# Altium PCB PCB2.PcbDoc
Units mil, origin at the board's own origin, x right, y up, seen from the top; angles counter-clockwise.
Board outline 6000 x 4000 mil, 2 copper layers (Top Layer, Bottom Layer); 19 components, 9 nets, 41 pads, 0 vias.
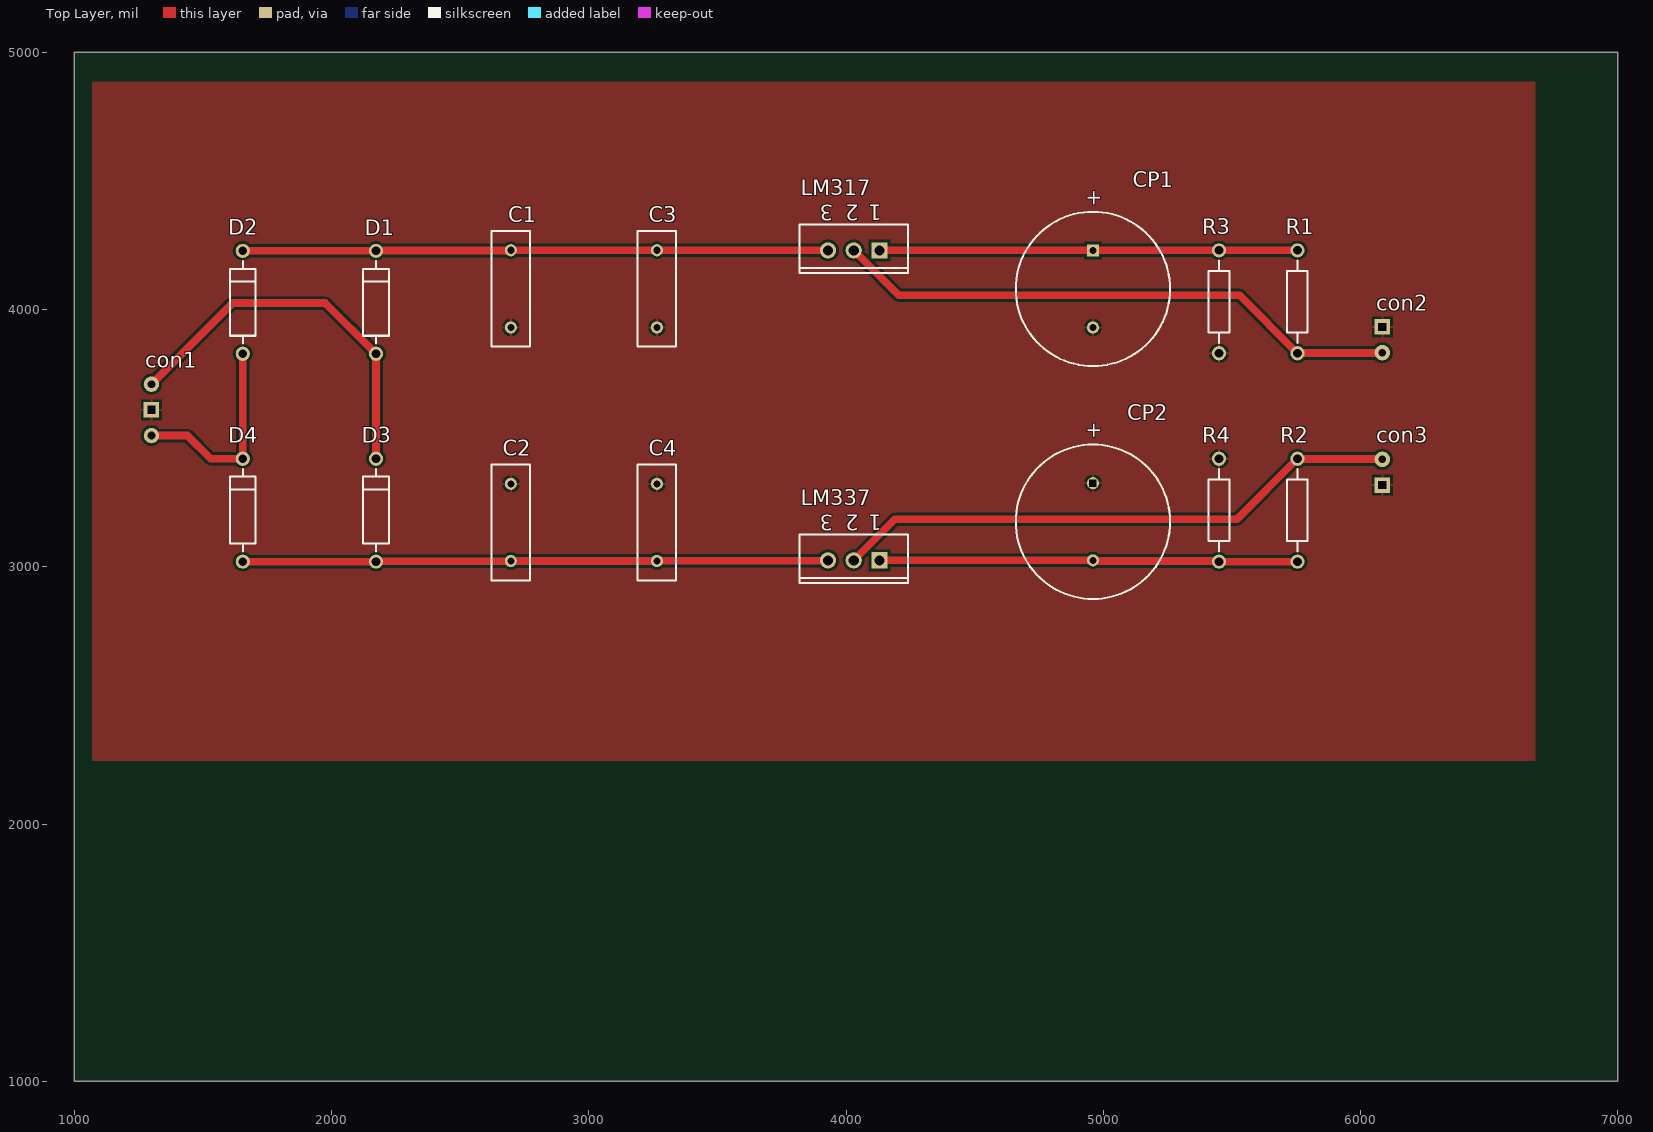
[diagram p0: Top Layer view]
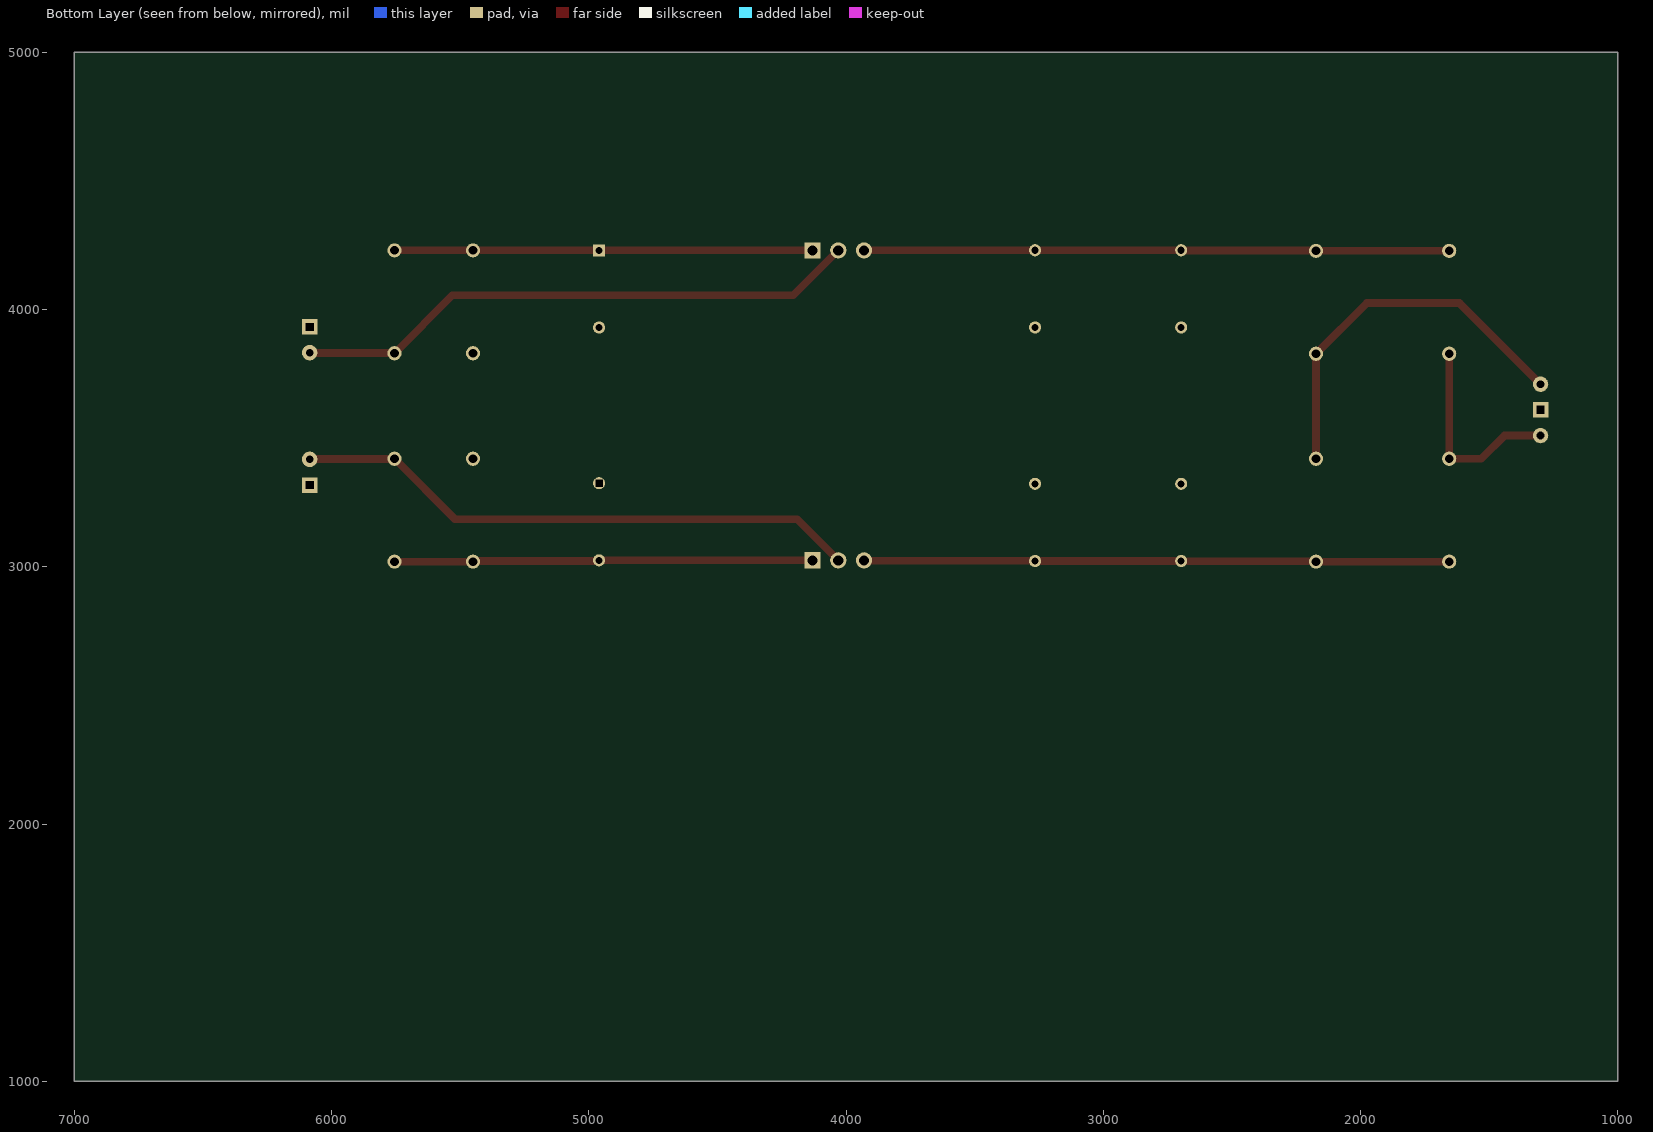
[diagram p1: Bottom Layer view, seen from below]

## Layer stack, top to bottom
Top Solder: solder mask 0.4, Solder Resist, Dk 3.5
Top Layer: signal copper 1.4
Dielectric 1: dielectric 12.6, FR-4, Dk 4.8
Bottom Layer: signal copper 1.4
Bottom Solder: solder mask 0.4, Solder Resist, Dk 3.5

## Board outline
1000,1000 7000,1000 7000,5000 1000,5000

## Design rules (kind name [scope] priority, off if disabled: settings)
Clearance [All] p1: gap=10 ignorepadtopadclearanceinfootprint=FALSE except(0: Arc-Hole Track-Hole SMDPad-Hole THPad-Hole Via-Hole Fill-Hole Poly-Hole Region-Hole Text-Hole)
PolygonConnect [All] p1: connectstyle=Relief reliefconductorwidth=10 reliefentries=4 polygonreliefangle="90 Angle" airgapwidth=10
RoomDefinition Sheet1 [InComponentClass('Sheet1')] p1: confinementstyle=ConfineIn formatcopy=TRUE lockcomponents=FALSE outline 1135,5320 6240,5320 6240,6040 1135,6040
RoutingVias [All] p1: holewidth=28 width=50 viastyle="Through Hole" minholewidth=28 minwidth=50 maxholewidth=28 maxwidth=50
SolderMaskExpansion [All] p1: expansion=4
Width [All] p1: maxlimit=30 minlimit=30 preferedwidth=30 minimp=50.000000 maximp=50.000000 favimp=50.000000
30 further rules are at their usual default settings.

## Components (designator, comment, footprint, x,y, rotation, side; value= is the part's Value field where it differs from the comment)
C1 "Cap" RAD-0.3 2697.13,4080.5 r90 top value=1000uF
C2 "Cap" RAD-0.3 2697.13,3172.38 r90 top value=1000uF
C3 "Cap" RAD-0.3 3265,4080.5 r90 top value=0.1uF
C4 "Cap" RAD-0.3 3265,3172.38 r90 top value=0.1uF
con1 "con3" con3 1300,3610 r90 top
con2 "con2" con2 6085,3832.44 r90 top
con3 "con2" con2 6085,3417.56 r270 top
CP1 "Cap Pol1" RB7.6-15#1 4960,4080 r90 top value=10uF
CP2 "Cap Pol1" RB7.6-15#2 4960,3175 r90 top locked value=10uF
D1 "Diode" DIODE-0.4 2172.87,4028.12 r90 top
D2 "Diode" DIODE-0.4 1655,4028.12 r90 top
D3 "Diode" DIODE-0.4 2172.87,3220 r90 top
D4 "Diode" DIODE-0.4 1655,3220 r90 top
LM317 "LM317" TO-220-AB 4030,4230 r180 top
LM337 "LM337" TO-220-AB 4030,3025 r180 top
R1 "Res2" AXIAL-0.4 5755,4030 r270 top value=200
R2 "Res2" AXIAL-0.4 5755,3220 r270 top value=200
R3 "Res2" AXIAL-0.4 5450,4030 r90 top value=600
R4 "Res2" AXIAL-0.4 5450,3220 r90 top value=600

## Footprints (in the part's own frame and the unit in brackets; to place one, negate y for a bottom-side part, rotate by r counter-clockwise, add the part's x,y. Pads: shape width x height; smd on the part's side, far side on the other; paste and mask are expansions set on the pad)
AXIAL-0.4 [mm] "Axial Device, Thru-Hole; 2 Leads; 0.4 in Pin Spacing"
  round 1.4 hole 0.85: 1(-5.08,0) 2(5.08,0)
  silkscreen extent -4.06,-1.02 4.06,1.02
con2 [mil]
  round 60 hole 30: 1(0,0)
  rect 60x60 hole 30 square: 2(100,0)
con3 [mil]
  round 60 hole 30: 1(-100,0) 3(100,0)
  rect 60x60 hole 30 square: 2(0,0)
DIODE-0.4 [mm] "Diode, Thru-Hole; 2 Leads; 0.4 in Pin Spacing"
  round 1.4 hole 0.85: 1(-5.08,0) 2(5.08,0)
  silkscreen extent -4.06,-1.27 4.06,1.27
RAD-0.3 [mm] "Radial Cap, Thru-Hole; 2 Leads; 0.3 in Pin Spacing"
  round 1.2 hole 0.7: 1(-3.81,0) 2(3.81,0)
  silkscreen extent -5.71,-1.91 5.71,1.91
RB7.6-15#1 [mm] "Polarized Capacitor (Radial); 2 Leads"
  rect 1.2x1.2 hole 0.7: 1(3.81,0)
  round 1.2 hole 0.7: 2(-3.81,0)
  silkscreen extent -7.62,-7.62 7.62,7.62
RB7.6-15#2 [mm] "Polarized Capacitor (Radial); 2 Leads"
  round 1.2 hole 0.7 square: 1(3.81,0)
  round 1.2 hole 0.7: 2(-3.81,0)
  silkscreen extent -7.62,-7.62 7.62,7.62
TO-220-AB [mm] "TO, Thru-Hole, Vertical, Heatsink Mounted; 3 In-Line Leads; Pitch 2.54 mm"
  rect 1.6x1.6 hole 1: 1(-2.54,0)
  round 1.6 hole 1: 2(0,0) 3(2.54,0)
  silkscreen extent -5.35,-2.55 5.35,2.25

## Part data
C1 C2 C3 C4: "Capacitor", LatestRevisionDate=17-Jul-2002, LatestRevisionNote="Re-released for DXP Platform.", PackageDescription="Radial Cap, Thru-Hole; 2 Leads; 0.3 in Pin Spacing", PackageReference=RAD-0.3, Published=8-Jun-2000, Publisher="Altium Limited"
CP1 CP2: "Polarized Capacitor (Radial)", LatestRevisionDate=17-Jul-2002, LatestRevisionNote="Re-released for DXP Platform.", PackageDescription="Polarized Capacitor (Radial); 2 Leads", PackageReference=RB7.6-15, Published=8-Jun-2000, Publisher="Altium Limited"
D1 D2 D3 D4: "Default Diode", Code_JEDEC=DO-214-AB, LatestRevisionDate=17-Jul-2002, LatestRevisionNote="Re-released for DXP Platform.", PackageDescription="DO-214-AB/SMC; 2 C-Bend Leads; Body 7.9 x 5.9 mm, inc. leads (LxW)", PackageReference=SMC, PackageVersion=Sep-1996, Published=8-Jun-2000, Publisher="Altium Limited"
R1 R2 R3 R4: "Resistor", LatestRevisionDate=17-Jul-2002, LatestRevisionNote="Re-released for DXP Platform.", PackageDescription="Axial Device, Thru-Hole; 2 Leads; 0.4 in Pin Spacing", PackageReference=AXIAL-0.4, Published=8-Jun-2000, Publisher="Altium Limited"

## Nets (pads, with @x,y where several pads share a name; then routed paths per layer and width w, separated by ;. In a path a pad name is that pad's centre, name@x,y a point inside that pad or via, vN(x,y) a via of type N, cw(c..) or ccw(c..) an arc to the next point about the centre after c; other vN are vias at no path point)
GND: C1.1 C2.2 C3.1 C4.2 con1.2 con2.2 con3.2 CP1.2 CP2.1 R3.1 R4.2
NetC1_2: C1.2 C3.2 D1.2 D2.2 LM317.3 | length 2276.9
  Top Layer w30: D2.2 D1.2 ; D1.2@2174.06,4229.31 C1.2@2695.94,4229.31 ; C1.2 C3.2 3265.25,4230.25 3929.75,4230.25 LM317.3
  Bottom Layer w30: D1.2 D1.2@2174.06,4229.31 ; C1.2@2695.94,4229.31 C1.2 ; C3.2 C3.2@3265.25,4230.25 ; LM317.3@3929.75,4230.25 LM317.3
NetC2_1: C2.1 C4.1 D3.1 D4.1 LM337.3 | length 2277.1
  Top Layer w30: D4.1 D3.1 ; D3.1@2174.06,3021.19 C2.1@2695.94,3021.19 ; C2.1 C4.1 ; C4.1@3266.31,3023.69 LM337.3@3928.69,3023.69
  Bottom Layer w30: D3.1 D3.1@2174.06,3021.19 ; C2.1@2695.94,3021.19 C2.1 ; C4.1 C4.1@3266.31,3023.69 ; LM337.3@3928.69,3023.69 LM337.3
Netcon1_1: con1.1 D2.1 D4.2 | length 800.4
  Top Layer w30: con1.1 1440,3510 1530,3420 D4.2 D2.1
Netcon1_3: con1.3 D1.1 D3.2 | length 1493
  Top Layer w30: con1.3 1615,4025 1975.99,4025 D1.1 D3.2
Netcon2_1: con2.1 LM317.2 R1.2 | length 2221.7
  Top Layer w30: LM317.2 4205,4055 5530,4055 R1.2 ; R1.2@5756.22,3831.22 con2.1@6083.78,3831.22
  Bottom Layer w30: R1.2 R1.2@5756.22,3831.22 ; con2.1@6083.78,3831.22 con2.1
Netcon3_1: con3.1 LM337.2 R2.1 | length 2219.6
  Top Layer w30: LM337.2 4190,3185 5520,3185 R2.1 ; R2.1@5756.22,3418.78 con3.1@6083.78,3418.78
  Bottom Layer w30: R2.1 R2.1@5756.22,3418.78 ; con3.1@6083.78,3418.78 con3.1
NetCP1_1: CP1.1 LM317.1 R1.1 R3.2 | length 1625
  Top Layer w30: LM317.1 CP1.1 R3.2 R1.1
NetCP2_2: CP2.2 LM337.1 R2.2 R4.1 | length 1627.1
  Top Layer w30: LM337.1 CP2.2 ; CP2.2@4962.5,3022.5 R4.1@5447.5,3022.5 ; R4.1 R2.2
  Bottom Layer w30: CP2.2 CP2.2@4962.5,3022.5 ; R4.1@5447.5,3022.5 R4.1

## Polygon pours and split planes (outlines as drawn)
GND on Top Layer "GND_L01_P022" (solid, remove dead copper, pour order 22): 1070,4890 1075,4885 6680,4885 6680,2245 1070,2245

## Text inside footprints (layer, text, board x,y; h text height)
CP1: Top Overlay "+" at 4989.01,4400.15 h59.06 r90
CP2: Top Overlay "+" at 4989.01,3495.15 h59.06 r90
LM317: Top Overlay "1" at 4139.84,4408.15 h59.06 r180; Top Overlay "2" at 4049.68,4408.15 h59.06 r180; Top Overlay "3" at 3949.68,4408.15 h59.06 r180
LM337: Top Overlay "3" at 3949.68,3203.15 h59.06 r180; Top Overlay "1" at 4139.84,3203.15 h59.06 r180; Top Overlay "2" at 4049.68,3203.15 h59.06 r180